# Altium PCB XMC-RG.PcbDoc
Units mil, origin at the board's own origin, x right, y up, seen from the top; angles counter-clockwise.
Board outline 3937.01 x 2677.17 mil, 2 copper layers (Top Layer, Bottom Layer); 96 components, 102 nets, 441 pads, 37 vias.
Unrouted connection lines stored in the file: 6.
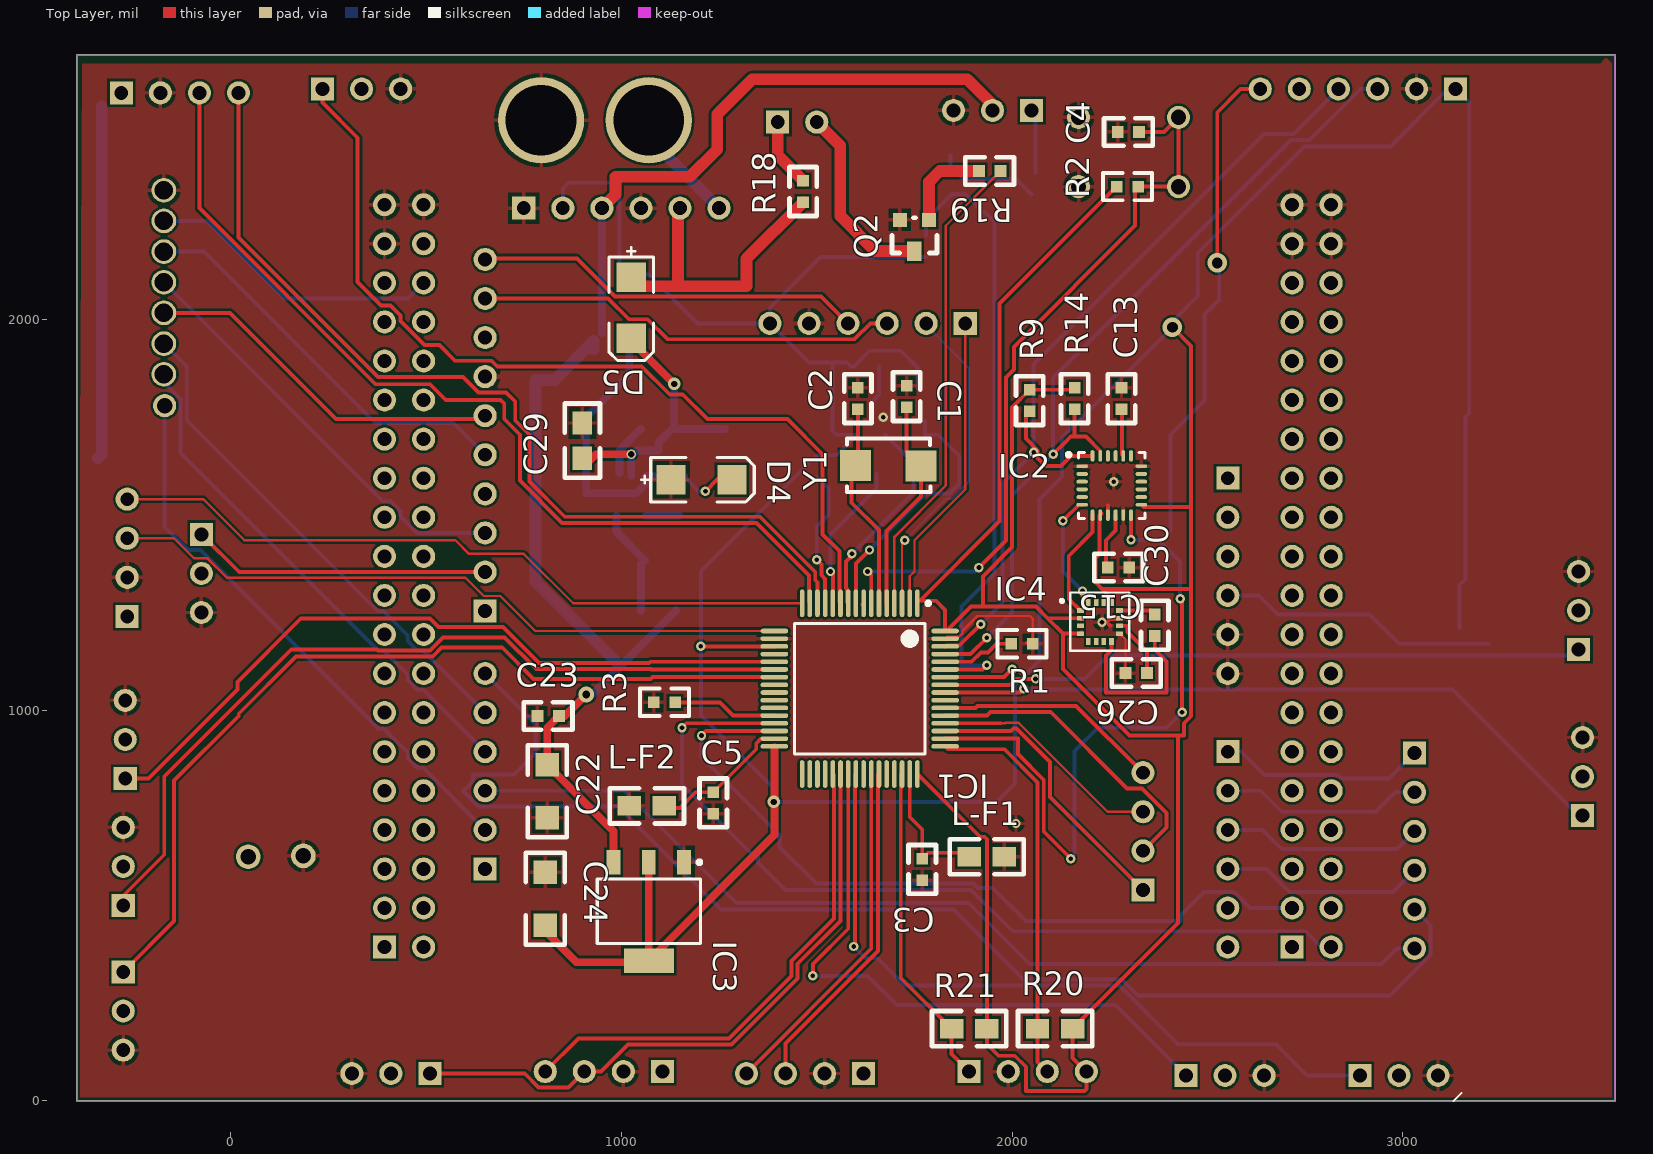
[diagram p0: Top Layer view]
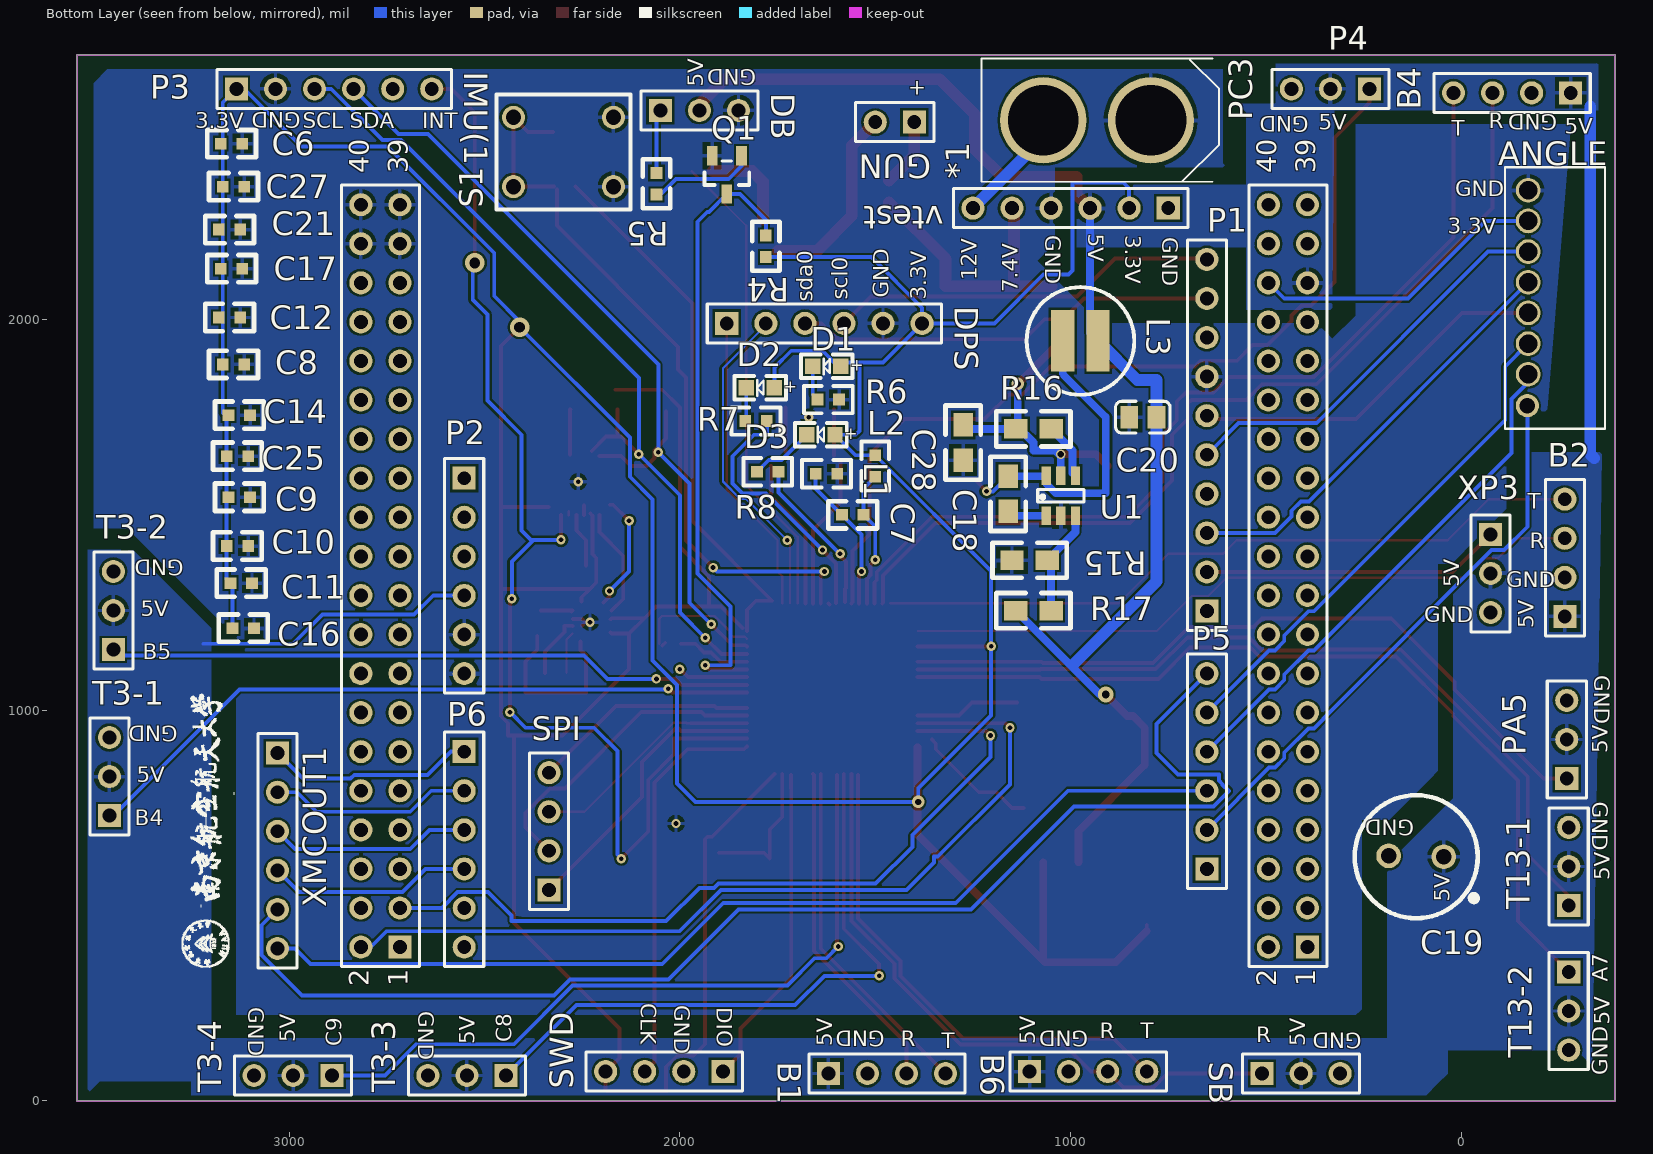
[diagram p1: Bottom Layer view, seen from below]

## Layer stack, top to bottom
Top Layer: signal copper 1.4
Dielectric: dielectric 12.6, FR-4, Dk 4.8
Bottom Layer: signal copper 1.4

## Board outline
-393.7,0 3543.31,0 3543.31,2677.17 -393.7,2677.17

## Design rules (kind name [scope] priority, off if disabled: settings)
Clearance [All] p1: gap=6
HoleSize [All] p1: absolutevalues=TRUE maxlimit=300 minlimit=1 maxpercent=80.000 minpercent=20.000
MinimumSolderMaskSliver [All] p1: minsoldermaskwidth=1
PolygonConnect [All] p1: connectstyle=Relief reliefconductorwidth=10 reliefentries=4 polygonreliefangle="90 Angle" airgapwidth=10
RoutingVias [All] p1: holewidth=28 width=50 viastyle="Through Hole" minholewidth=28 minwidth=50 maxholewidth=28 maxwidth=50
SilkToSilkClearance [All] p1 off: silktosilkclearance=0
SilkToSolderMaskClearance [IsPad] p1 off: minsilkscreentomaskgap=1 clearancetoexposedcopper=TRUE
SolderMaskExpansion [All] p1: expansion=4
UnConnectedPin [All] p1:
Width [All] p1: maxlimit=30 minlimit=6 preferedwidth=10
24 further rules are at their usual default settings.

## Components (designator, comment, footprint, x,y, rotation, side; value= is the part's Value field where it differs from the comment)
*1 "xt60" XT60 1070,2510 r90 bottom
ANGLE "S8B-PH-K-S_2mm" PH_2MM_8PIN -170,2055 r90 bottom
B1 "Header 4" HDR1X4 1620,70 r180 bottom
B2 "Header 4" HDR1X4 -265,1240 r90 bottom
B4 "Header 4" HDR1X4 -280,2580 r0 bottom (schematic designator B2)
B6 "Header 4" HDR1X4 1105,75 r180 bottom
C1 "18PF/0603" 0603C 1730,1830 r270 top
C2 "18pF/0603" 0603C 1605,1825 r270 top
C3 "2.2UF/0603" 0603C 1770,620 r270 top
C4 "100nF/0603" 0603C 2325,2480 r180 top
C5 "2.2UF/0603" 0603C 1235,735 r90 top
C6 "100nF/0603" 0603C 3120,2450 r0 bottom
C7 "100nF/0603" 0603C 1585,1500 r180 bottom
C8 "100nF/0603" 0603C 3170,1885 r180 bottom
C9 "100nF/0603" 0603C 3155,1545 r180 bottom
C10 "100nF/0603" 0603C 3160,1420 r180 bottom
C11 "100nF/0603" 0603C 3150,1325 r180 bottom
C12 "100nF/0603" 0603C 3180,2005 r180 bottom
C13 "2.2nF/0603/50V" 0603C 2280,1770 r90 top
C14 "10nF/0603/50V" 0603C 3155,1755 r180 bottom
C15 "100nF/0603/50V" 0603C 2300,1365 r180 top
C16 "1uF/0603/50V" 0603C 3090,1210 r0 bottom
C17 "100nF/0603/50V" 0603C 3120,2130 r0 bottom
C18 "Cap" 0805 1160,1598.82 r270 bottom
C19 "Cap Pol1" 电解电容330uf，470uf 45,625 r0 bottom
C20 "" LC-0805_C 815,1750 r0 bottom
C21 "100nF/0603/50V" 0603C 3125,2230 r0 bottom
C22 "10uF/1206" 1206 810,725 r90 top
C23 "100nF/0603" 0603 785,985 r0 top
C24 "10uF/1206" 1206 805,585 r270 top
C25 "100nF/0603" 0603 3105,1650 r0 bottom
C26 "4.7uF/0603/50V" 0603C 2345,1095 r180 top
C27 "100nF/0603/50V" 0603C 3115,2340 r0 bottom
C28 "Cap" 0805 1275,1730 r270 bottom
C29 "Cap" 0805 900,1645 r90 top
C30 "220nF/0603/50V" 0603C 2365,1190 r90 top
D1 "LED" 0603D 1625,1880 r0 bottom
D2 "LED" 0603D 1795,1825 r0 bottom
D3 "LED" 0603D 1640,1705 r0 bottom
D4 "SS14" SS14 1205,1590 r0 top
D5 "SS14" SS14 1025,2030 r270 top
DB "Header 3" HDR1X3 2050,2535 r180 bottom
DPS "Header 6" HDR1X6 1880,1990 r180 bottom (schematic designator IMU(1)
GUN "Header 2" HDR1X2 1400,2505 r0 bottom
IC1 "STM32F405RGT6" LQFP64_N 1610,1055 r270 top
IC2 "MPU6050" QFN-24N-MPU6050 2255,1575 r0 top
IC3 "AMS1117-3.3V" SOT223-AMS1117 1070,485 r270 top
IC4 "HMC5883" HMC5883 2275,1255 r0 top
IMU(1 "Header 6" HDR1X6 3135,2590 r180 bottom
L1 "BLM18PG221SN1/0603" 0603L 1625,1605 r180 bottom
L2 "BLM18PG221SN1/0603" 0603L 1500,1625 r90 bottom
L3 "Inductor" 4.7uh 1020,1945 r180 bottom
L-F1 "L" 0805 1890,625 r0 top
L-F2 "L" 0805 1110,755 r180 top
P1 "X304" HDR1X10 651.18,1253.7 r90 bottom
P2 "Header 6" HDR1X6 2552,1593.7 r270 bottom
P3 "Header 20X2" HDR2X20 2716.54,393.7 r90 bottom
P4 "Header 20X2" HDR2X20 393.7,393.7 r90 bottom
P5 "Header 6" HDR1X6 651.18,593.7 r90 bottom
P6 "Header 6" HDR1X6 2552,893.7 r270 bottom
PA5 "Header 3" HDR1X3 -270,825 r90 bottom
PC3 "Header 3" HDR1X3 235,2590 r0 bottom
Q1 "PMBT3904" LC-SOT-23(SOT-23-3) 1880,2370 r90 bottom
Q2 "MMBT3906" sot23 1750,2215 r180 top
R1 "10K/0603" 0603r 2025,1170 r180 top
R2 "10K/0603" 0603R 2295,2340 r180 top
R3 "10K/0603" 0603r 1110,1020 r180 top
R4 "4.7K" 0603 1780,2160 r90 bottom
R5 "4.7K" 0603 2060,2375 r270 bottom
R6 "1K" 0603R 1620,1795 r180 bottom
R7 "1K/0603" 0603R 1805,1740 r180 bottom
R8 "1K/0603" 0603R 1775,1610 r180 bottom
R9 "10K/0603" 0603 2045,1765 r90 top
R14 "10K/0603" 0603 2160,1770 r90 top
R15 "Res2" 0805 1060,1383.82 r0 bottom
R16 "Res2" 0805 1140,1720 r180 bottom
R17 "Res2" 0805 1140,1255 r180 bottom
R18 "5.1R" 0603 1465,2300 r90 top
R19 "300R/0603" 0603 1970,2380 r180 top
R20 "10K" 0805 2065,185 r0 top
R21 "10K" 0805 1845,185 r0 top
S1 "SW-PB" SW_6*6*5 2170,2340 r0 bottom
SB "Header 3" HDR1X3 510,70 r180 bottom
SPI "Header 4" HDR1X4 2335,540 r90 bottom (schematic designator B1X)
SWD "Header 4" HDR1X4 1890,75 r0 bottom
T3-1 "Header 3" HDR1X3 3460,730 r90 bottom
T3-2 "Header 3" HDR1X3 3450,1155 r90 bottom
T3-3 "Header 3" HDR1X3 2445,65 r0 bottom
T3-4 "Header 3" HDR1X3 2890,65 r0 bottom
T13-1 "Header 3" HDR1X3 -275,500 r90 bottom
T13-2 "Header 3" HDR1X3 -275,330 r270 bottom
U1 "MP2359" mp2359 1025,1548.82 r90 bottom
vtest "Header 6" HDR1X6 750,2285 r0 bottom
XMCOUT1 "Header 6" HDR1X6 3030,890 r270 bottom
XP3 "Header 3" HDR1X3 -75,1450 r270 bottom
Y1 "CRY" XTAL_5032 1790,1695 r180 top

## Footprints (in the part's own frame and the unit in brackets; to place one, negate y for a bottom-side part, rotate by r counter-clockwise, add the part's x,y. Pads: shape width x height; smd on the part's side, far side on the other; paste and mask are expansions set on the pad)
4.7uh [mm]
  rect 1.5x4 smd: 1(0,0) 2(2.3,0)
  silkscreen extent -2.35,-3.5 4.65,3.5
0603 [mil]
  rect 30x30 smd: 1(0,0) 2(55,0)
  silkscreen extent -35,-35 90,35
0603C [mil]
  rect 30x30 smd: 1(0,0) 2(55,0)
  silkscreen extent -35,-35 90,35
0603D [mm]
  rect 1x1 smd: 1(-0.94,0) 2(0.889,0)
  silkscreen extent -1.7,-0.76 1.65,0.76, body extent -1.03,-0.53 0.99,0.53, height 0.46
0603L [mil]
  rect 30x30 smd: 1(27.5,0) 2(-27.5,0)
  silkscreen extent -63,-35 63,35, body extent -20,-13 19,11, height 20
0603r [mil]
  rect 30x30 smd: 1(-27.5,0) 2(27.5,0)
  silkscreen extent -63,-35 63,35, body extent -51,-20 51,19, height 21
0603R [mil]
  rect 30x30 smd: 1(-27.5,0) 2(27.5,0)
  silkscreen extent -63,-35 63,35, body extent -51,-20 51,19, height 21
0805 [mil]
  rect 60x50 smd: 1(0,0) 2(90,0)
  silkscreen extent -50,-45 140,45
1206 [mil]
  rect 60x60 smd: 1(0,0) 2(135,0)
  silkscreen extent -50,-50 185,50
HDR1X2 [mm] "Connector; Header; 2 Position"
  rect 1.5x1.5 hole 0.9: 1(0,0)
  round 1.5 hole 0.9: 2(2.54,0)
  silkscreen extent -1.27,-1.27 3.81,1.27
HDR1X3 [mm] "Connector; Header; 3 Position"
  rect 1.5x1.5 hole 0.9: 1(0,0)
  round 1.5 hole 0.9: 2(2.54,0) 3(5.08,0)
  silkscreen extent -1.27,-1.27 6.35,1.27
HDR1X4 [mm] "Connector; Header; 4 Position"
  rect 1.5x1.5 hole 0.9: 1(0,0)
  round 1.5 hole 0.9: 2(2.54,0) 3(5.08,0) 4(7.62,0)
  silkscreen extent -1.27,-1.27 8.89,1.27
HDR1X6 [mm] "Connector; Header; 6 Position"
  rect 1.5x1.5 hole 0.9: 1(0,0)
  round 1.5 hole 0.9: 2(2.54,0) 3(5.08,0) 4(7.62,0) 5(10.16,0) 6(12.7,0)
  silkscreen extent -1.27,-1.27 13.97,1.27
HDR1X10 [mm] "Connector; Header; 10 Position"
  rect 1.5x1.5 hole 0.9: 1(0,0)
  round 1.5 hole 0.9: 2(2.54,0) 3(5.08,0) 4(7.62,0) 5(10.16,0) 6(12.7,0) 7(15.24,0) 8(17.78,0) 9(20.32,0) 10(22.86,0)
  silkscreen extent -1.27,-1.27 24.13,1.27
HDR2X20 [mm] "Connector; Header; 20x2 Position"
  rect 1.5x1.5 hole 0.9: 1(0,0)
  round 1.5 hole 0.9: 2(0,2.54) 3(2.54,0) 4(2.54,2.54) 5(5.08,0) 6(5.08,2.54) 7(7.62,0) 8(7.62,2.54) 9(10.16,0) 10(10.16,2.54) 11(12.7,0) 12(12.7,2.54) 13(15.24,0) 14(15.24,2.54) 15(17.78,0) 16(17.78,2.54) 17(20.32,0) 18(20.32,2.54) 19(22.86,0) 20(22.86,2.54) 21(25.4,0) 22(25.4,2.54) 23(27.94,0) 24(27.94,2.54) 25(30.48,0) 26(30.48,2.54) 27(33.02,0) 28(33.02,2.54) 29(35.56,0) 30(35.56,2.54) 31(38.1,0) 32(38.1,2.54) 33(40.64,0) 34(40.64,2.54) 35(43.18,0) 36(43.18,2.54) 37(45.72,0) 38(45.72,2.54) 39(48.26,0) 40(48.26,2.54)
  silkscreen extent -1.27,-1.27 49.53,3.81
HMC5883 [mm]
  rect 0.45x0.3 smd: 1(-2.55,0.001) 2(-2.55,-0.499) 3(-2.55,-0.999) 4(-2.55,-1.499) 9(0,-1.5) 10(0,-1) 11(0,-0.5) 12(0,0)
  rect 0.3x0.45 smd: 5(-2.025,-2.024) 6(-1.525,-2.024) 7(-1.025,-2.024) 8(-0.525,-2.024) 13(-0.525,0.525) 14(-1.025,0.525) 15(-1.525,0.525) 16(-2.025,0.525)
  silkscreen extent -3.82,-2.62 0.64,1.17
LC-0805_C [mm]
  rect 1.16x1.47 smd: 1(-0.89,0) 2(0.89,0)
  silkscreen extent -1.77,-1.04 1.77,1.04, body extent -1,-0.63 1,0.62, height 0.77
LC-SOT-23(SOT-23-3) [mm]
  rect 1.25x0.7 smd: 1(1.25,-0.95) 2(1.25,0.95) 3(-1.25,0)
  silkscreen extent -0.65,-1.46 0.9,1.46, body extent -1.5,-1.5 1.5,1.5, height 1.3
LQFP64_N [mm] "Thin QFP, 64-Leads, Body 10x10mm, Pitch 0.5mm, IPC Medium Density"
  oval 1.8x0.3 smd: 1(-5.55,3.75) 2(-5.55,3.25) 3(-5.55,2.75) 4(-5.55,2.25) 5(-5.55,1.75) 6(-5.55,1.25) 7(-5.55,0.75) 8(-5.55,0.25) 9(-5.55,-0.25) 10(-5.55,-0.75) 11(-5.55,-1.25) 12(-5.55,-1.75) 13(-5.55,-2.25) 14(-5.55,-2.75) 15(-5.55,-3.25) 16(-5.55,-3.75) 33(5.55,-3.75) 34(5.55,-3.25) 35(5.55,-2.75) 36(5.55,-2.25) 37(5.55,-1.75) 38(5.55,-1.25) 39(5.55,-0.75) 40(5.55,-0.25) 41(5.55,0.25) 42(5.55,0.75) 43(5.55,1.25) 44(5.55,1.75) 45(5.55,2.25) 46(5.55,2.75) 47(5.55,3.25) 48(5.55,3.75)
  oval 0.3x1.8 smd: 17(-3.75,-5.55) 18(-3.25,-5.55) 19(-2.75,-5.55) 20(-2.25,-5.55) 21(-1.75,-5.55) 22(-1.25,-5.55) 23(-0.75,-5.55) 24(-0.25,-5.55) 25(0.25,-5.55) 26(0.75,-5.55) 27(1.25,-5.55) 28(1.75,-5.55) 29(2.25,-5.55) 30(2.75,-5.55) 31(3.25,-5.55) 32(3.75,-5.55) 49(3.75,5.55) 50(3.25,5.55) 51(2.75,5.55) 52(2.25,5.55) 53(1.75,5.55) 54(1.25,5.55) 55(0.75,5.55) 56(0.25,5.55) 57(-0.25,5.55) 58(-0.75,5.55) 59(-1.25,5.55) 60(-1.75,5.55) 61(-2.25,5.55) 62(-2.75,5.55) 63(-3.25,5.55) 64(-3.75,5.55)
  silkscreen extent -5.67,-4.25 4.25,4.58, body extent -5,-5 5,5, height 1.6
mp2359 [mm] "SOT23, 6-Leads, Body 3.0x3.0mm (max), Pitch 0.95mm, IPC Medium Density"
  rect 1.2x0.6 smd: 1(-1.3,0.95) 2(-1.3,0) 3(-1.3,-0.95) 4(1.3,-0.95) 5(1.3,0) 6(1.3,0.95)
  silkscreen extent -0.4,-1.5 0.4,1.5, body extent -0.85,-1.5 0.85,1.5, height 1.45
PH_2MM_8PIN [mm]
  round 1.5 hole 1: 1(-7,0.025)
  round 1.6 hole 1.2: 2(-4.957,-0.025) 3(-2.964,-0.025) 4(-0.971,-0.025) 5(1.021,-0.025) 6(3.014,-0.025) 7(5.007,-0.025) 8(7,-0.025)
  silkscreen extent -8.5,-5.02 8.5,1.48
QFN-24N-MPU6050 [mm] "QFN, 24-Leads, Body 3.95x3.95mm, Pitch 0.50mm, Thermal Pad 2.60x2.70mm, IPC Medium Density"
  oval 0.75x0.25 smd: 1(-1.925,1.25) 2(-1.925,0.75) 3(-1.925,0.25) 4(-1.925,-0.25) 5(-1.925,-0.75) 6(-1.925,-1.25) 13(1.925,-1.25) 14(1.925,-0.75) 15(1.925,-0.25) 16(1.925,0.25) 17(1.925,0.75) 18(1.925,1.25)
  oval 0.25x0.75 smd: 7(-1.25,-1.925) 8(-0.75,-1.925) 9(-0.25,-1.925) 10(0.25,-1.925) 11(0.75,-1.925) 12(1.25,-1.925) 19(1.25,1.925) 20(0.75,1.925) 21(0.25,1.925) 22(-0.25,1.925) 23(-0.75,1.925) 24(-1.25,1.925)
  silkscreen extent -2.92,-2.15 2.15,2.15, body extent -2,-2 2,2, height 0.95
sot23 [mil]
  rect 36x36 smd: B(-37.5,-40) E(37.5,-40)
  rect 36x50 smd: C(0.5,40)
  silkscreen extent -58,-45 58,45
SOT223-AMS1117 [mm] "SOT223, 4-Leads, Body 6.50x7.00mm (avg), Pitch 2.29mm, IPC Medium Density"
  rect 1.6x0.9 smd: 1(-3.2,2.29) 2(-3.2,0) 3(-3.2,-2.29)
  rect 1.6x3.25 smd: 2(3.2,0)
  silkscreen extent -3.32,-3.35 2.1,3.42, body extent -1.86,-3.35 1.85,3.35, height 1.8
SS14 [mil] ""
  rect 75x75 smd: 1(-78,0) 2(78,0)
  silkscreen extent -155,-57 135,57
SW_6*6*5 [mm]
  round 1.5 hole 1: 1(0,-4.5) 1(0,0) 2(6.5,-4.5) 2(6.5,0)
  silkscreen extent -1.1,-6 7.6,1.5
XT60 [mm]
  round 5.6 hole 4.6: 12V(0,0) GND(0,-7)
  silkscreen extent -4,-11.43 4,4
XTAL_5032 [mil]
  rect 78.74x78.74 smd: 0(23,70) 1(191,69)
  silkscreen extent -1,0 213,137
电解电容330uf，470uf [mm] "330uf，470uf"
  round 1.6 hole 1: 1(0,0) 2(3.581,-0.051)
  silkscreen extent -2.21,-4 5.79,4

## Part data
ANGLE: library part MHDR1X8, "Header, 8-Pin"
B1 B2 B4 B6 SPI SWD: "Header, 4-Pin"
C1 C2 C3 C4 C5 C6 C7 C8 C9 C10 C11 C12: library part CAP1
C13 C14 C15 C16 C17 C20 C21 C22 C23 C24 C25 C26 C27 C30: library part Cap, "Capacitor"
C18 C28 C29: "Capacitor"
C19: "Polarized Capacitor (Radial)"
D1 D2 D3: library part LED2, "Typical RED, GREEN, YELLOW, AMBER GaAs LED"
D4 D5: library part Diode, "Default Diode"
DB PA5 PC3 SB T3-1 T3-2 T3-3 T3-4 T13-1 T13-2 XP3: "Header, 3-Pin"
DPS IMU(1 P2 P5 P6 vtest XMCOUT1: "Header, 6-Pin"
GUN: "Header, 2-Pin"
L1 L2: library part INDUCTOR1
P1: library part "Header 10", "Header, 10-Pin"
P3 P4: "Header, 20-Pin, Dual row"
Q1: library part NPN, "NPN Bipolar Transistor"
Q2: library part 2N3904
R1 R2 R3: library part RES
R4 R5: library part Res2, "Resistor"
R6 R7 R8 R9 R14 R18 R19: library part Res1, "Resistor"
R15 R16 R17: "Resistor"
R20 R21: library part R
S1: "Switch"

## Via types
v1: diameter 24, hole 12, Top Layer to Bottom Layer, 31 vias
v2: diameter 50, hole 28, Top Layer to Bottom Layer, 2 vias
v3: diameter 32, hole 16, Top Layer to Bottom Layer, 2 vias
v4: diameter 24, hole 16, Top Layer to Bottom Layer, 1 vias
v5: diameter 40, hole 20, Top Layer to Bottom Layer, 1 vias

## Nets (pads, with @x,y where several pads share a name; then routed paths per layer and width w, separated by ;. In a path a pad name is that pad's centre, name@x,y a point inside that pad or via, vN(x,y) a via of type N, cw(c..) or ccw(c..) an arc to the next point about the centre after c; other vN are vias at no path point)
3.3V: ANGLE.7 C6.2 C8.1 C9.1 C10.1 C11.1 C12.1 C14.1 C16.2 C17.2 C21.2 C24.2 C25.2 C27.2 D1.1 D2.1 D3.1 DPS.6 IC1.1 IC1.19 IC1.32 IC1.48 IC1.64 IC2.8 IC2.13 IC3.2 IC4.2 IC4.4 IC4.13 IMU(1.1 L2.1 P2.3 P3.34 P3.36 P4.36 P4.38 R2.2 R4.1 R9.2 R14.2 R20.2 R21.2 SWD.4 vtest.2 | length 16820
  Top Layer w10: C24.2@805,435 C24.2 ; v1(1203.27,1163.27) IC1.19 ; IC1.48 1918.13,676 1929.56,676 1936,669.56 1936,145 1965.47,115.53 2006.79,115.53 2035,87.31 2035,25 2185,25 2190,30 SWD.4 2155,110 R20.2 2425,455 2425,935 ; IC1.64 1828.5,1256.5 1805,1280 1764.13,1280 1968,1483.87 1968,2040.5 R2.2 ; 1840,1210 1895,1265 2061,1265 2090.63,1235.37 ; 1925,1270 1925,1342.47 2000,1417.47 2000,1775 R9.2 R14.2@2165,1820 ; IC4.4@2177.39,1198.78 IC4.4 2130,1196 ; IC4.2@2177.39,1232.59 IC4.2 2090.63,1235.37 ; IC2.8@2229.16,1502.9 IC2.8 2224,1497.74 2224,1399.56 2214,1389.56 2214,1326.64 2230,1310.64 ; IC4.13@2251.55,1278.45 2251.55,1289.08 2230,1310.64 ; 2336.57,1520 2458,1520 ; v2(2410,1980) 2458,1932 2458,1520 ; 2453.64,1310.64 2230,1310.64 ; 2090.63,1235.37 2130,1196 ; 2130,1196 2130,1105 2300,935 2425,935 ; 2425,935 2440,935 2440,966.47 2458,984.47 2458,1520
  Top Layer w20: C24.2@805,435 885,355 IC3.2@1065.98,355 ; IC3.2@1070,610.98 1070,359.02 1391.5,680.51 IC1.32@1391.5,905.14
  Bottom Layer w10: ANGLE.7 -62.13,2252.13 136.83,2053.17 453.17,2053.17 P4.36 ; vtest.2 850,2335 865,2350 995,2350 995,2125 1005,2115 1070,2115 1195,1990 DPS.6 ; D2.1 1758,1877 1715,1920 1635,1920 1595,1880 D1.1 1578,1890 1540,1890 ; R4.1 1510,2160 1380,2030 DPS.6 ; C16.2 3145,1320 C11.1 3160,1335 C10.1 C25.2 3160,1750 3170,1760 C8.1 C27.2 3170,2555 3135,2590 3115,2590 2968,2443 2748,2443 2475,2170 2475,2060 2410,1995 v2(2410,1980) 2128,1698 2128,1597.37 2070,1539.37 2070,1127.53 2007,1064.53 2007,812 1960,765 v3(1390,765) 1390,800 1203.27,986.73 v1(1203.27,1163.27) 1203.27,1355.77 L2.1 1550.5,1652.5 D3.1 1550,1705 1540,1715 1540,1890 ; DPS.6 1480,1890 1540,1890
5V: B1.1 B2.1 B4.1 B6.1 C19.1 C20.1 C22.2 C23.2 DB.2 IC3.3 L3.2 P2.4 P3.31 P4.35 PA5.2 PC3.2 R17.1 SB.2 T3-1.2 T3-2.2 T3-3.2 T3-4.2 T13-1.2 T13-2.2 vtest.3 XP3.2 | length 5081.9
  Top Layer w20: v5(910,1040) 855,985 C23.2 810,955 C22.2 979.84,690.16 IC3.3
  Top Layer w30: vtest.3 985,2320 985,2365 1175,2365 1245,2435 1245,2525 1335,2615 1885,2615 DB.2@1950,2550
  Bottom Layer w10: P2.4 2631.3,1293.7 2680,1245 2915,1245 2990,1170 3220,1170
  Bottom Layer w20: v5(910,1040) 925,1040 R17.1 ; L3.2@950,1965.55 vtest.3
  Bottom Layer w30: -340,1645 -330,1655 -330,2545 ; C20.1 779.96,1330.04 992.5,1117.5 ; C20.1 780,1845 829.45,1845 L3.2 L3.2@929.45,1923.66
12V: *1.12V vtest.6 | length 299.6
  Bottom Layer w10: *1.12V@1070,2465 *1.12V
  Bottom Layer w30: *1.12V@1070,2465 vtest.6
A3V3: C7.2 IC1.13 L2.2 | length 357.7
  Top Layer w10: v1(1500,1385) 1512,1373 1512,1345.47 1521.42,1336.06 IC1.13
  Bottom Layer w10: v1(1500,1385) 1500,1470 C7.2 1530,1567.5 L2.2
ADC0: P6.1 XMCOUT1.1 | length 533.4
  Bottom Layer w10: P6.1 2586.3,893.7 2645.77,834.23 2833.32,834.23 2842.55,825 2965,825 XMCOUT1.1
ADC1: P6.2 XMCOUT1.2 | length 521
  Bottom Layer w10: P6.2 2636.3,793.7 2690,740 2930,740 2980,790 XMCOUT1.2
ADC1_PC0: IC1.8 | length 3.9
  Top Layer w10: IC1.8@1617.06,1270.72 IC1.8
ADC2: P6.3 XMCOUT1.3 | length 516.8
  Bottom Layer w10: P6.3 2641.3,693.7 2690,645 2985,645 XMCOUT1.3
ADC2_PC3: IC1.11 PC3.1 | length 2313.3
  Top Layer w10: PC3.1 235,2555 325,2465 325,2095.53 385,2035.53 409.19,2035.53 434.23,2010.49 434.23,1995.86 495.86,1934.23 534.23,1934.23 574.23,1894.23 667.97,1894.23 682.2,1880 1051.82,1880 1123.82,1808 1157,1808 1220,1745 1425,1745 1515,1655 1515,1450 1558.01,1406.99 1558.01,1276.28 IC1.11
ADC3: P6.4 XMCOUT1.4 | length 525.1
  Bottom Layer w10: P6.4 2651.3,593.7 2710,535 2975,535 XMCOUT1.4
ADC3_PA5: IC1.21 PA5.1 | length 1890.7
  Top Layer w10: PA5.1 -210,825 17.5,1052.5 17.5,1072.5 179.23,1234.23 510.49,1234.23 531.54,1213.17 696.83,1213.17 788.83,1121.17 1071.33,1121.17 1074.05,1123.9 IC1.21
AGND: C7.1 IC1.12 L1.2 | length 382.7
  Top Layer w10: v1(1535,1355) 1541.1,1348.9 IC1.12
  Bottom Layer w10: v1(1535,1355) 1535,1450 C7.1 1652.5,1567.5 L1.2
ARM_RESET: C4.1 IC1.7 R2.1 S1.2 | length 1890.5
  Top Layer w10: v1(1630,1355) 1639.53,1345.47 IC1.7 ; v1(1915,1365) 1984,1434 1984,1851 2005,1872 2005,1930 2315,2240 R2.1@2315,2332.5 ; R2.1 2425.91,2340 2425.91,2517.17 2388.74,2480 C4.1
  Bottom Layer w10: v1(1630,1355) 1905,1355
AUX_CL: IC2.7 IC4.1 | length 281.6
  Top Layer w10: IC4.1 2145,1284.66 2145,1395 2205.79,1455.79 IC2.7
AUX_DA: IC2.6 IC4.16 | length 302.5
  Top Layer w10: v1(2130,1485) 2170.79,1525.79 IC2.6 ; v1(2180,1305) 2180,1290.94 IC4.16
  Bottom Layer w10: v1(2130,1485) 2130,1355 v1(2180,1305)
DC_IN: D5.1 R18.1 vtest.5 | length 742.1
  Top Layer w30: D5.1@1048,2085 1145,2085 ; vtest.5@1145,2280 1145,2085 ; R18.1 1320,2155 1320,2085 1145,2085
GND: *1.GND ANGLE.8 B1.2 B2.2 B4.2 B6.2 C1.1 C2.1 C3.2 C4.2 C5.1 C6.1 C8.2 C9.2 C10.2 C11.2 C12.2 C13.2 C14.2 C15.1 C16.1 C17.1 C19.2 C20.2 C21.1 C22.1 C23.1 C24.1 C25.1 C26.2 C27.1 C28.2 C29.2 D4.1 DB.3 DPS.5 IC1.18 IC1.63 IC2.1 IC2.9 IC2.11 IC2.18 IC3.1 IC4.9 IC4.11 IMU(1.2 L1.1 L-F1.2 L-F2.2 P1.7 P2.5 P2.6 P3.37 P3.38 P3.39 P3.40 P4.37 P4.39 P4.40 PA5.3 PC3.3 Q1.2 Q2.E R1.1 R3.2 R6.2 R15.2 S1.1 SB.3 SWD.2 T3-1.3 T3-2.3 T3-3.3 T3-4.3 T13-1.3 T13-2.3 U1.2 vtest.1 vtest.4 XP3.3 | length 530.9
  Top Layer w6: IC1.63 1833.28,1187.73 1864.21,1187.73 1872.94,1196.46 1872.94,1202.94 1873.24,1202.94 1911.3,1241 2046,1241 2052.5,1234.5 R1.1 ; IC4.9 2290,1180.94 C26.2 ; IC2.11 IC2.11@2284.53,1509.06
  Top Layer w10: 2037.33,1172.67 R1.1@2045,1165 ; v1(2230,1225) 2242.14,1225 ; IC2.9 2245.16,1524.27 ; 2250.72,1216.42 2242.14,1225 ; IC4.11@2273.27,1233.58 2250.72,1233.58 2242.14,1225
  other v1: 2010,710 2260,1585 1670,1750
GUN-: GUN.2 Q2.C | length 491.6
  Top Layer w30: GUN.2 1560,2445 1560,2265 1650,2175 Q2.C
GUN_PB15: IC1.4 R19.1 | length 1218.9
  Top Layer w6: IC1.4 1698.58,1443.58 1830,1575 1830,2240 R19.1
I2C1_SCL_PB8: IC1.61 IC2.23 IMU(1.3 R14.1 | length 2219.8
  Top Layer w10: IC1.61 1893.58,1143.58 v1(1935,1185) ; v1(2105,1655) 2135,1685 2150,1700 2160,1700 ; R14.1 2160,1700 ; IC2.23@2225.47,1663.46 2188.93,1700 2160,1700
  Bottom Layer w10: v1(1935,1185) 2000,1250 2000,1550 v1(2105,1655) 2105,1850 2714,2459 2761.31,2459 2892.31,2590 2935,2590
I2C1_SDA_PB9: IC1.62 IC2.24 IMU(1.4 R9.1 | length 2200.5
  Top Layer w10: IC1.62 1831.28,1166.05 1865.03,1166.05 v1@1920,1221.01 ; R9.1@2035,1765 2035,1695 2065,1665 2065,1645 2085,1625 2125,1625 2150.79,1650.79 IC2.24
  Bottom Layer w10: v1(1920,1220) 1975,1275 1975,1580 v1(2055,1660) 2055,1885 2645,2475 2720,2475 2835,2590
I2C2_SCL_PC13: DPS.1 IC1.2 | length 775.3
  Top Layer w6: IC1.2 1737.95,1342.95 1750,1355 1750,1435 1880,1565 DPS.1
I2C2_SDA_PC14: DPS.2 IC1.3 | length 841.7
  Top Layer w6: IC1.3 1718.27,1425 1725.15,1431.88 v1(1725.15,1435.15)
  Bottom Layer w6: v1(1725.15,1435.15) 1831,1541 1845.8,1541 1889.8,1585 1889.8,1875.2 1780,1985 DPS.2
IO8: P3.6
LED_GREEN_PC1: IC1.9 R7.2 | length 666.5
  Top Layer w10: IC1.9@1600,1273.66 1600,1375 v1(1635,1410)
  Bottom Layer w10: v1(1635,1410) 1780,1555 1840,1555 1865,1580 1865,1650 1810,1705 1777.5,1705 R7.2
LED_RED_PC2: IC1.10 R8.2 | length 406.3
  Top Layer w10: IC1.10@1577.69,1276.28 1577.69,1310.03 1575,1312.73 1575,1380 1590,1395 v1(1590,1400)
  Bottom Layer w10: v1(1590,1400) 1747.5,1557.5 R8.2
MPU6050_INT_PA15: IC1.50 IC2.12 IMU(1.6 | length 3042.4
  Top Layer w10: IC1.50 2015,927.05 2015,887.63 2081,821.63 2081,689 v1(2150,620) ; v1(2304.21,1435.79) IC2.12 ; v1(2430,1285) 2435,1280 v1(2435,995) ; v2(2525,2145) 2525,2530 2585,2590 2635,2590 2635,2580
  Bottom Layer w10: 2160,630 2160,895 2220,955 2395,955 v1(2435,995) ; v1(2304.21,1435.79) 2375,1435.79 ; v1(2430,1285) 2430,1380.79 2375,1435.79 ; v2(2525,2145) 2530,2145 2530,2050 2492.5,2012.5 2492.5,1792.5 2405,1705 2405,1460 2380.79,1435.79 2375,1435.79
NetAIR_3: 
NetAIR_4: 
NetANGLE_1: 
NetANGLE_2: 
NetANGLE_3: 
NetANGLE_4: 
NetANGLE_5: 
NetANGLE_6: 
NetC1_2: C1.2 IC1.5 Y1.0 | length 501
  Top Layer w10: IC1.5 1678.9,1458.9 1767,1547 Y1.0 ; Y1.0@1730,1662 C1.2
NetC2_2: C2.2 IC1.6 Y1.1 | length 509.6
  Top Layer w10: Y1.1@1589,1636 1589,1531 1659.21,1460.79 IC1.6 ; Y1.1@1605,1652 C2.2
NetC3_1: C3.1 IC1.47 L-F1.1 | length 366
  Top Layer w10: IC1.47 1737.95,727.05 1770,695 C3.1 1785,635 L-F1.1@1900,635
NetC5_2: C5.2 IC1.31 L-F2.1 | length 316.3
  Top Layer w10: L-F2.1@1120,750 1150,750 1190,790 C5.2 1345.06,900.06 1345.06,915.06 1355,925
NetC13_1: C13.1 IC2.20 | length 115.8
  Top Layer w10: C13.1 2280.76,1769.24 IC2.20@2280.76,1654.55
NetC15_2: C15.2 IC2.10 | length 139.5
  Top Layer w10: C15.2@2240,1370 2240,1435 2264.84,1459.84 IC2.10
NetC18_1: C18.1 D4.2 L3.1 U1.6 | length 866.6
  Top Layer w10: v1(1215,1560) 1245,1590 D4.2
  Bottom Layer w10: C18.1 1198.82,1560 v1(1215,1560)
  Bottom Layer w20: L3.1 1020,1860 910,1750 910,1555 1038.06,1555 1062.4,1579.34 U1.6 ; U1.6@1063.58,1598.82 C18.1
NetC18_2: C18.2 U1.1 | length 86.4
  Bottom Layer w20: U1.1 C18.2@1148.82,1497.64
NetC26_1: C26.1 IC4.10 | length 161.9
  Top Layer w10: IC4.10 2275.37,1216 2295,1216 2295,1200 2345,1150 C26.1
NetC28_1: C28.1 C29.1 D5.2 R16.1 U1.5 | length 737.8
  Top Layer w20: C29.1@905,1625 935,1655 v4(1025,1655) ; D5.2@1025,1945 v3(1135,1835)
  Top Layer w30: D5.2@1025,1945 D5.2
  Bottom Layer w10: v4@1025,1650 v4(1025,1655)
  Bottom Layer w20: U1.5 1025,1650 1040,1665 1095,1665 1095,1685 1135,1725 v3(1135,1835) ; R16.1 C28.1@1265,1720
NetD1_2: D1.2 R6.1 | length 90.2
  Bottom Layer w10: R6.1 1660,1807.5 D1.2
NetD2_2: D2.2 R7.1 | length 82.5
  Bottom Layer w10: R7.1@1830,1742.5 D2.2
NetD3_2: D3.2 R8.1 | length 166.9
  Bottom Layer w10: D3.2 1740,1640 1772.5,1640 R8.1
NetDB_1: DB.1 R5.1 | length 164.1
  Bottom Layer w10: DB.1 2060,2525 R5.1
NetGUN_1: GUN.1 R18.2 | length 176.9
  Top Layer w30: GUN.1 1400,2420 R18.2
NetIC1_28: IC1.28 R3.1 | length 268
  Top Layer w10: R3.1 1252.2,1020 1286.1,986.1 IC1.28
NetIC1_60: IC1.60 R1.2 | length 188.1
  Top Layer w10: IC1.60 1896.53,1123.9 1920.63,1148 1938,1148 1960,1170 R1.2
NetQ1_2: Q1.1 R5.2 | length 264.2
  Bottom Layer w10: Q1.1 1842.6,2392.4 1875,2360 2010,2360 R5.2@2050,2320
NetQ2_1: Q2.B R19.2 | length 236.4
  Top Layer w30: Q2.B 1787.5,2352.5 1815,2380 R19.2
NetR15_1: R15.1 R17.2 U1.3 | length 262.6
  Bottom Layer w20: U1.3 987.6,1456.22 R15.1 ; R17.2 R15.1@1050,1373.82
NetR16_2: R16.2 U1.4 | length 135.4
  Bottom Layer w20: U1.4@995,1607.4 995,1665 R16.2
RST#: P3.32
RX0: 
SCL0: DPS.4 P1.10 | length 998.9
  Top Layer w10: P1.10 653.98,2156.5 885.94,2156.5 983.44,2059 1511,2059 DPS.4
SDA0: DPS.3 P1.9 | length 1088.8
  Top Layer w10: P1.9 966.12,2053.7 1019.32,2000.5 1067.06,2000.5 1118.08,1949.47 1596.79,1949.47 1637.31,1990 DPS.3
SETC: C30.2 IC4.12 | length 83.9
  Top Layer w10: IC4.12@2277.78,1252.22 IC4.12 C30.2@2355,1255
SETP: C30.1 IC4.8 | length 448.7
  Top Layer w10: IC4.8 2254.33,1154.33 2240,1140 2240,1045 2395,1045 2395,1125 2365,1155 C30.1
SPI3_CS_PD2: IC1.54 SPI.4 | length 579.5
  Top Layer w10: IC1.54 1905.79,1005.79 1911,1011 2164,1011 SPI.4
SPI3_MISO_PC11: IC1.52 SPI.3 | length 599.7
  Top Layer w6: 1971.42,966.42 1983.1,966.42 ; 1984.05,967.37 2017.11,967.37 2244.47,740 SPI.3
  Top Layer w10: IC1.52 1971.42,966.42
SPI3_MOSI_PC12: IC1.53 SPI.2 | length 799.1
  Top Layer w10: IC1.53 1936.1,986.1 1945,995 2098.94,995 2294.47,799.47 2332.84,799.47 2395,737.31 2395,700 SPI.2
SPI3_SCK_PC10: IC1.51 SPI.1 | length 733
  Top Layer w10: IC1.51 1996.73,946.73 2003.37,953.37 2011.31,953.37 2097,867.67 2097,778 SPI.1
SPI_CLK: ANGLE.4 P1.6 | length 926
  Top Layer w10: ANGLE.4 -1.75,2016.75 270,1745 P1.6@642.48,1745
SPI_CS: ANGLE.5 P1.3 | length 1096.9
  Bottom Layer w10: ANGLE.5 390,1534.23 410.49,1534.23 434.23,1510.49 434.23,1495.86 476.91,1453.17 650.65,1453.17 P1.3
SPI_MISO: ANGLE.6 P1.5 | length 1037.5
  Bottom Layer w10: ANGLE.6 -68.67,2173.67 370,1735 569.88,1735 P1.5
SPI_MOSI: P1.4
SWCLK_PA14: IC1.49 R20.1 SWD.3 | length 1025.1
  Top Layer w10: IC1.49 1835.87,900 1980,900 2065,815 R20.1 2065,100 SWD.3
SWDIO_PA13: IC1.46 R21.1 SWD.1 | length 831.4
  Top Layer w10: IC1.46@1715.49,833.72 1715.49,799.97 1715,799.48 1715,315 R21.1 1845,120 SWD.1
TIM3_CH1_PB4: IC1.56 T3-1.1 | length 1767.3
  Top Layer w10: IC1.56 2020.16,1045.16 v1(2030,1055)
  Bottom Layer w10: v1(2030,1055) 2031.83,1053.17 3126.83,1053.17 T3-1.1@3455,725
TIM3_CH2_PB5: IC1.57 T3-2.1 | length 1637.6
  Top Layer w10: IC1.57 1994.84,1064.84 2010,1080 v1(2060,1080)
  Bottom Layer w10: v1(2060,1080) 2185,1080 2245,1140 T3-2.1@3435,1140
TIM3_CH3_PC8: IC1.39 T3-3.1 | length 1614.6
  Top Layer w10: v1(1490,320) 1490,350 1580.47,440.47 IC1.39
  Bottom Layer w10: v1(1490,320) 1630,320 1705,245 2265,245 T3-3.1
TIM3_CH4_PC9: IC1.40 T3-4.1 | length 1871.4
  Top Layer w10: v1(1595,395) 1597.38,397.38 IC1.40@1597.38,833.72
  Bottom Layer w10: v1(1595,395) 1625,365 1655,365 1725,295 2275,295 2425,145 2675,145 2755,65 T3-4.1
TIM4_CH1_PB6: IC1.58 | length 180
  Top Layer w10: IC1.58 1979.53,1084.53 v1(2000,1105)
TIM5_CH1_PA0: B4.4 IC1.14 | length 2381.9
  Top Layer w10: B4.4 20,2210.09 376.91,1853.17 594.39,1853.17 634.39,1813.17 705,1813.17 728.17,1790 728.17,1741.83 765,1705 765,1585 855,1495 1355,1495 1496,1354 1496,1333.11 1501.73,1327.38 IC1.14
TIM5_CH2_PA1: B4.3 IC1.15 | length 2409
  Top Layer w10: B4.3 -80,2285 370.77,1834.23 510.49,1834.23 550.49,1794.23 690.77,1794.23 700,1785 700,1745 740,1705 740,1587.37 848.37,1479 1346,1479 1480,1345 1480,1275.55 IC1.15
TIM13_CH1_PA6: IC1.22 T13-1.1 | length 2116.6
  Top Layer w10: T13-1.1 -275,525 -170,630 -170,830 155,1155 375.09,1155 376.91,1153.17 510.49,1153.17 543.5,1186.19 701.19,1186.19 782.2,1105.17 1076.03,1105.17 ; 1076.99,1104.21 IC1.22
TIM13_CH2_PA7: IC1.23 T13-2.1 | length 2254.3
  Top Layer w10: T13-2.1 -145,460 -145,820 20.53,985.53 ; 20.53,990.87 166.83,1137.17 517.12,1137.17 539.97,1160.03 694.97,1160.03 775.41,1079.59 1075,1079.59 1079.94,1084.53 IC1.23
USART1_RX(PB7): IC1.59 Q1.3 R4.2 | length 1617.7
  Top Layer w10: IC1.59 1924.21,1104.21 v1(1935,1115)
  Bottom Layer w10: R4.2 1780,2255 1845.79,2320.79 Q1.3 1925.79,2275 1930,2275 1955,2250 1955,1350 1870,1265 1870,1115 v1(1935,1115)
USART1_RX_PA10: B1.3 IC1.43 | length 865.6
  Top Layer w10: B1.3 1420,147.37 1656.43,383.81 1656.43,833.72 IC1.43
USART1_RX_PB7: 
USART1_TX_PA9: B1.4 IC1.42 | length 898.8
  Top Layer w10: B1.4 1639.53,389.53 IC1.42
USART2_RX_PA3: B2.3 IC1.17 | length 1754.8
  Top Layer w6: B2.3 -145,1440 -93.53,1388.53 -59.04,1388.53 -9.69,1339.17 600.83,1339.17 647.77,1292.23 689.71,1292.23 779.3,1202.64 IC1.17
USART2_TX_PA2: B2.4 IC1.16 | length 1837.7
  Top Layer w6: B2.4 -70,1540 35,1435 575,1435 610,1400 750,1400 876.5,1273.5 IC1.16
USART3_RX_PB11: IC1.30 P3.3 | length 2005.3
  Top Layer w10: v1(1205,935) 1216.73,946.73 IC1.30
  Bottom Layer w10: v1(1205,935) 1205,880 1405,680 1405,650 1499,556 1901.63,556 1912.63,545 1950,545 2035,460 2430.77,460 2430.77,474.23 2490.77,534.23 2568.79,534.23 2609.31,493.7 P3.3
USART3_TX_PB10: IC1.29 P3.2 | length 2207.2
  Top Layer w10: v1(1155,955) 1166.42,966.42 IC1.29
  Bottom Layer w10: v1(1155,955) 1155,810 1340,625 1350,625 1350,610 1420,540 1895,540 2000.77,434.23 2750.62,434.23 P3.2@2791.15,393.7 ; P3.2@2793.72,396.28 P3.2@2796.3,393.7
USART6_RX_PC7: B6.3 IC1.38 SB.1 | length 1639.8
  Top Layer w10: SB.1 752.69,70 788.21,34.47 864.47,34.47 B6.3 947.69,75 1016.69,144 1281.63,144 1451,313.37 1451,351 1560.79,460.79 IC1.38
USART6_TX_PC6: B6.4 IC1.37 | length 1290.4
  Top Layer w10: B6.4 890,160 1275,160 1435,320 1435,357.63 1543.69,466.31 IC1.37@1543.69,833.91
X_IO0: P5.3 XMCOUT1.6 | length 2579.2
  Bottom Layer w10: P5.3 1006.3,793.7 1294,506 1889,506 2045,350 2945,350 2985,390 XMCOUT1.6
X_IO1: P5.6 XMCOUT1.5 | length 3361.4
  Bottom Layer w10: P5.6 780,964.88 780,890 725,835 619.65,835 619.65,819.49 610.65,810.49 610.65,808.91 594.65,792.91 634.39,753.17 991.71,753.17 1254.88,490 1850,490 2029,311 2281.63,311 2322.63,270 2967.31,270 3070.53,373.21 3070.53,449.47 XMCOUT1.5
X_IO3: P4.32
X_IO4: P3.11
X_IO5: P3.5
X_PWM0: ANGLE.1 P5.2 | length 1461.4
  Bottom Layer w10: ANGLE.1 -169.02,1469.4 -109.08,1409.47 -77.16,1409.47 353.17,979.14 353.17,976.91 376.91,953.17 391.54,953.17 453.17,891.54 453.17,876.91 476.91,853.17 491.71,853.17 P5.2
X_PWM1: ANGLE.2 P5.4 | length 1323.9
  Bottom Layer w10: ANGLE.2 -170.98,1838.69 -128.49,1796.2 -128.49,1658.58 376.91,1153.17 391.54,1153.17 453.17,1091.54 453.17,1076.91 476.91,1053.17 491.71,1053.17 P5.4
X_PWM2: ANGLE.3 P5.5 | length 1302.4
  Bottom Layer w10: ANGLE.3 -112.49,1879.8 -112.49,1742.58 376.91,1253.17 391.54,1253.17 453.17,1191.54 453.17,1176.91 476.91,1153.17 491.71,1153.17 P5.5
X_PWM3: P1.2 XP3.1 | length 767.3
  Top Layer w10: XP3.1 21.83,1353.17 650.65,1353.17 P1.2
  Bottom Layer w10: P1.2@650.65,1353.17 P1.2
X_RX2: P3.15
X_TX2: P3.1
pads on no net: IC1.20 IC1.24 IC1.25 IC1.26 IC1.27 IC1.33 IC1.34 IC1.35 IC1.36 IC1.41 IC1.44 IC1.45 IC1.55 IC2.2 IC2.3 IC2.4 IC2.5 IC2.14 IC2.15 IC2.16 IC2.17 IC2.19 IC2.21 IC2.22 IC4.3 IC4.5 IC4.6 IC4.7 IC4.14 IC4.15 IMU(1.5 P1.1 P1.8 P2.1 P2.2 P3.4 P3.7 P3.8 P3.9 P3.10 P3.12 P3.13 P3.14 P3.16 P3.17 P3.18 P3.19 P3.20 P3.21 P3.22 P3.23 P3.24 P3.25 P3.26 P3.27 P3.28 P3.29 P3.30 P3.33 P3.35 P4.1 P4.2 P4.3 P4.4 P4.5 P4.6 P4.7 P4.8 P4.9 P4.10 P4.11 P4.12 P4.13 P4.14 P4.15 P4.16 P4.17 P4.18 P4.19 P4.20 P4.21 P4.22 P4.23 P4.24 P4.25 P4.26 P4.27 P4.28 P4.29 P4.30 P4.31 P4.33 P4.34 P5.1 P6.5 P6.6

## Polygon pours and split planes (outlines as drawn)
5V on Bottom Layer "hahaha" (solid, remove dead copper, pour order 12): -350,2660 -345,2655 475,2655 475,2555 485,2545 475,2535 -350,2535
5V on Bottom Layer "hahaha" (solid, remove dead copper, pour order 14): 324.68,2551.49 568.51,2551.49 570,2550 550,2530 550,2025 335,2025 330,2030
5V on Bottom Layer "hahaha" (solid, remove dead copper, pour order 16): 505,2350 1020,2350 1020,2225 1005,2210 955.91,2259.09 502.98,2259.09
5V on Bottom Layer "hahaha" (solid, remove dead copper, pour order 17): 525,2345 975,2345 1000,2320 985,2305 985,2185 490,2185
5V on Bottom Layer "hahaha" (solid, remove dead copper, pour order 18): -360,1655 -355,1660 20,1660 20,775 130,665 190,605 190,130 -295,130 -335,90
5V on Bottom Layer "hahaha" (solid, remove dead copper, pour order 19): 3255,105 3200,160 35,160 35,70 60,45 90,15 3250,15 3250,65 3245,70 3250,75 3250,110 3250,115 3230,135
5V on Bottom Layer "hahaha" (solid, remove dead copper, pour order 20): 3360,1415 3365,1410 3515,1410 3515,30 3510,25 3485,50 3200,50 3200,1210 3405,1415 3400,1420 3395,1420 3415,1420 3430,1405
GND on Bottom Layer "D" (solid, remove dead copper, pour order 13): -280,2500 270,2500 270,2010 330,1950 370,1990 580,1990 925,1990 1085,2150 1040,2195 1040,2390 610,2390 605,2395 610,2400 610,2640 3465,2640 3500,2605 3500,1465 3415,1465 3110,1160 3135,1135 3135,220 270,220 260,230 255,235 255,720 185,720 80,825 60,845 60,1375 25,1375 -90,1490 -115,1515 -115,1765 -215,1765 -220,1770
GND on Top Layer "hahaha" (solid, remove dead copper, pour order 15): 2190,1645 2315,1645 2320,1640 2320,1510 2185,1510 2190,1515 2190,1645
GND on Top Layer "hahaha" (solid, remove dead copper, pour order 21): 2185,1270 2270,1270 2270,1180 2190,1180 2185,1185
GND on Top Layer "hahaha" (solid, remove dead copper, pour order 22): -380,2655 3505,2655 3520,2670 3543.31,2646.69 3543.31,0 -378.7,0 -393.7,15

## Keep-outs
Keep-Out Layer:
  the board outline again, w5

## Silkscreen, mask and mechanical layers (free items; w line width, h text height)
Top Overlay:
  lines w5: 3130,0 3150,20
Bottom Overlay:
  drawing of 6145 lines, arcs and shapes, not listed
  text "GND" at 1805,2640 h40 r180
  text "5V" at 1940,2595 h40 r270
  text "+" at 1415,2575 h40
  text "GND" at 2970,2530 h40 r180
  text "GND" at -245,2525 h40 r180
  text "GND" at 390,2520 h40 r180
  text "R" at -70,2490 h40
  text "INT" at 2660,2490 h40
  text "SDA" at 2845,2490 h40
  text "SCL" at 2965,2490 h40
  text "3.3V" at 3240,2490 h40
  text "5V" at 365,2485 h40
  text "5V" at -265,2475 h40
  text "T" at 25,2470 h40
  text "GND" at 15,2315 h40
  text "3.3V" at 35,2220 h40
  text "5V" at 955,2220 h40 r90
  text "3.3V" at 860,2215 h40 r90
  text "GND" at 1065,2215 h40 r90
  text "GND" at 765,2210 h40 r90
  text "12V" at 1240,2100 h40 r270
  text "7.4V" at 1135,2070 h40 r270
  text "GND" at 1465,2055 h40 r270
  text "3.3V" at 1370,2050 h40 r270
  text "scl0" at 1570,2050 h40 r270
  text "sda0" at 1660,2045 h40 r270
  text "T" at -170,1515 h40
  text "R" at -175,1415 h40
  text "GND" at 3270,1385 h40 r180
  text "GND" at -115,1315 h40
  text "5V" at 5,1315 h40 r270
  text "5V" at 3380,1240 h40
  text "GND" at 95,1225 h40
  text "5V" at -185,1210 h40 r270
  text "B5" at 3375,1130 h40
  text "GND" at -340,1090 h40 r90
  text "GND" at 3285,960 h40 r180
  text "5V" at -375,890 h40 r270
  text "5V" at 3390,815 h40
  text "GND" at -335,765 h40 r90
  text "GND" at 120,720 h40 r180
  text "B4" at 3395,705 h40
  text "5V" at -380,565 h40 r270
  text "5V" at 30,510 h40 r270
  text "A7" at -375,305 h40 r270
  text "CLK" at 2100,250 h40 r90
  text "GND" at 2015,245 h40 r90
  text "DIO" at 1905,240 h40 r90
  text "GND" at 3105,240 h40 r90
  text "GND" at 2670,230 h40 r90
  text "5V" at -380,195 h40 r270
  text "GND" at 955,180 h40 r180
  text "GND" at 1475,180 h40 r180
  text "GND" at 255,175 h40 r180
  text "T" at 820,160 h40
  text "R" at 925,160 h40
  text "R" at 525,150 h40
  text "C8" at 2430,150 h40 r270
  text "5V" at 2985,150 h40 r270
  text "5V" at 1090,145 h40 r270
  text "5V" at 2525,145 h40 r270
  text "5V" at 400,140 h40 r270
  text "R" at 1435,140 h40
  text "5V" at 1610,140 h40 r270
  text "C9" at 2865,140 h40 r270
  text "T" at 1330,135 h40
  text "GND" at -375,65 h40 r270

## Text inside footprints (layer, text, board x,y; h text height)
D1: Bottom Overlay "+" at 1530,1895 h30 r180
D2: Bottom Overlay "+" at 1700,1840 h30 r180
D3: Bottom Overlay "+" at 1545,1720 h30 r180
P3: Bottom Overlay "1" at 2696.54,293.7 h50 r270; Bottom Overlay "2" at 2796.54,293.7 h50 r270; Bottom Overlay "40" at 2796.54,2373.7 h50 r270; Bottom Overlay "39" at 2696.54,2373.7 h50 r270
P4: Bottom Overlay "1" at 373.7,293.7 h50 r270; Bottom Overlay "2" at 473.7,293.7 h50 r270; Bottom Overlay "40" at 473.7,2373.7 h50 r270; Bottom Overlay "39" at 373.7,2373.7 h50 r270